# Altium PCB PCB1.PcbDoc
Units mm, origin at the board's own origin, x right, y up, seen from the top; angles counter-clockwise.
Board outline 67.6 x 70 mm, 2 copper layers (Top Layer, Bottom Layer); 49 components, 45 nets, 237 pads, 52 vias.
Unrouted connection lines stored in the file: 12.
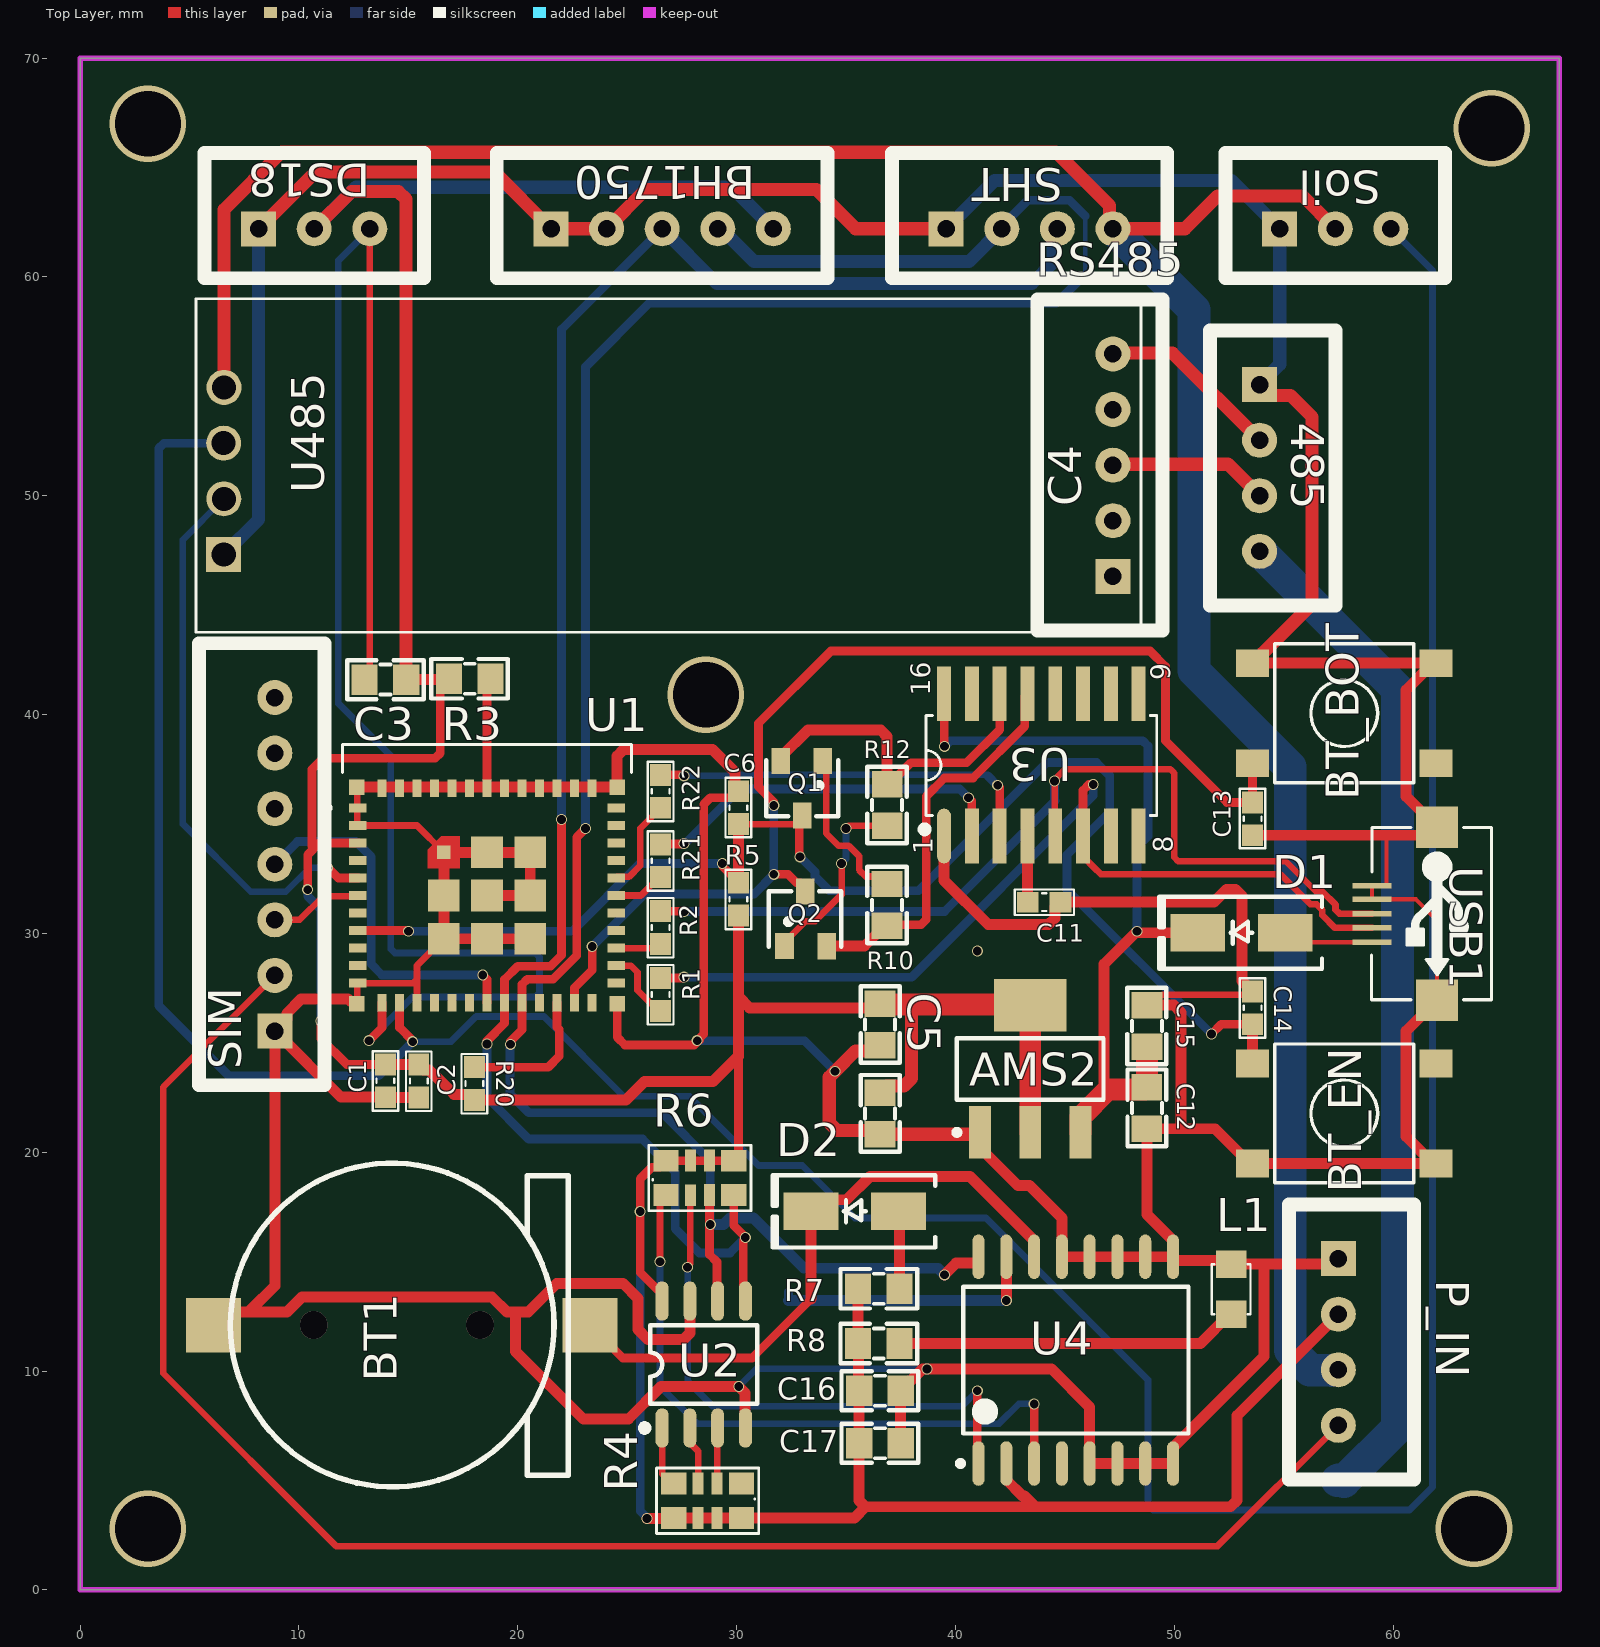
[diagram p0: Top Layer view]
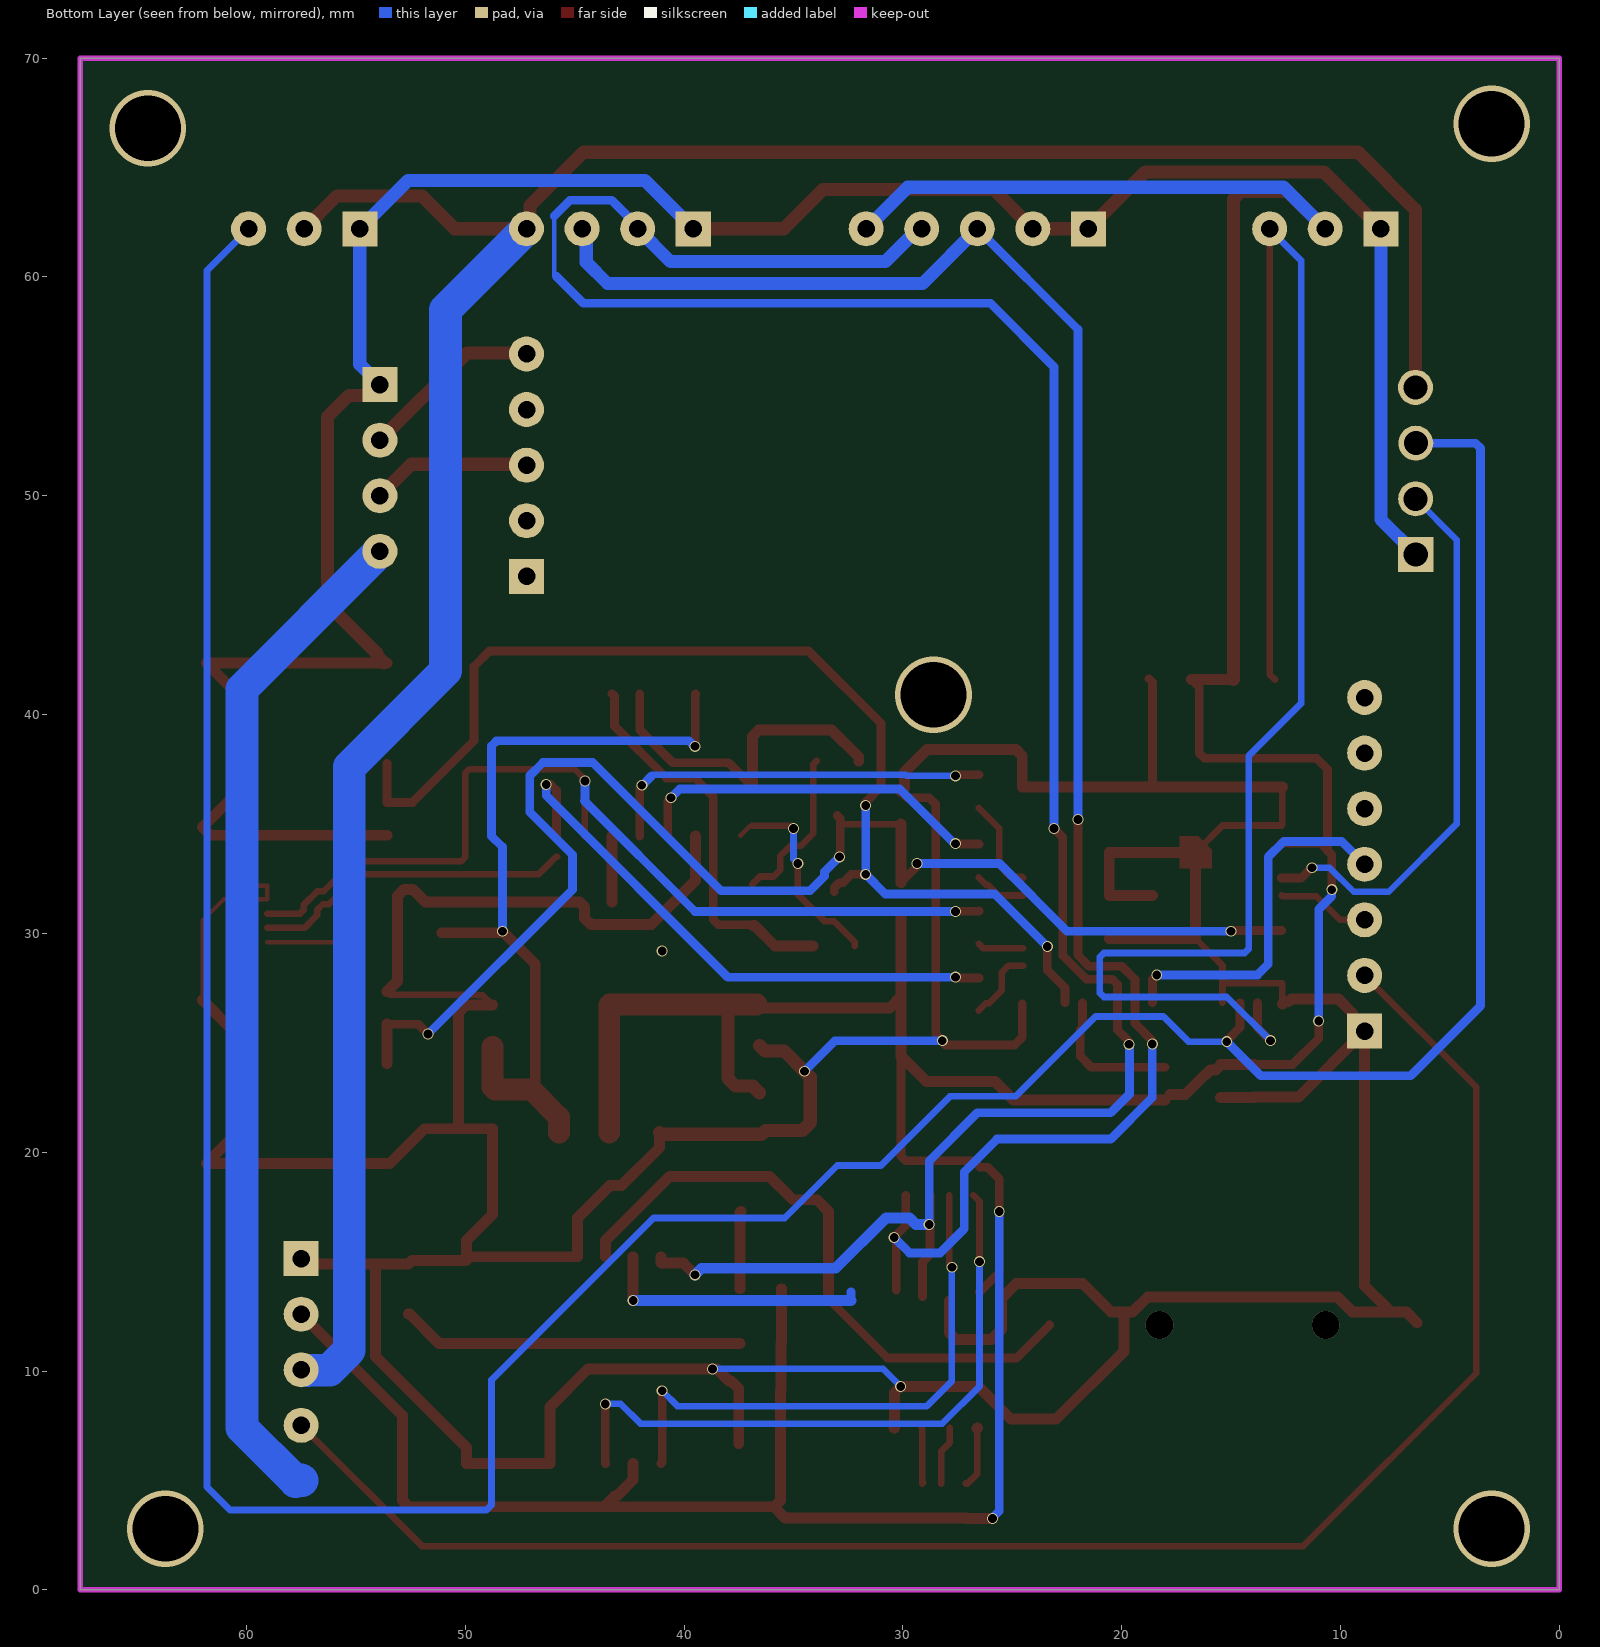
[diagram p1: Bottom Layer view, seen from below]
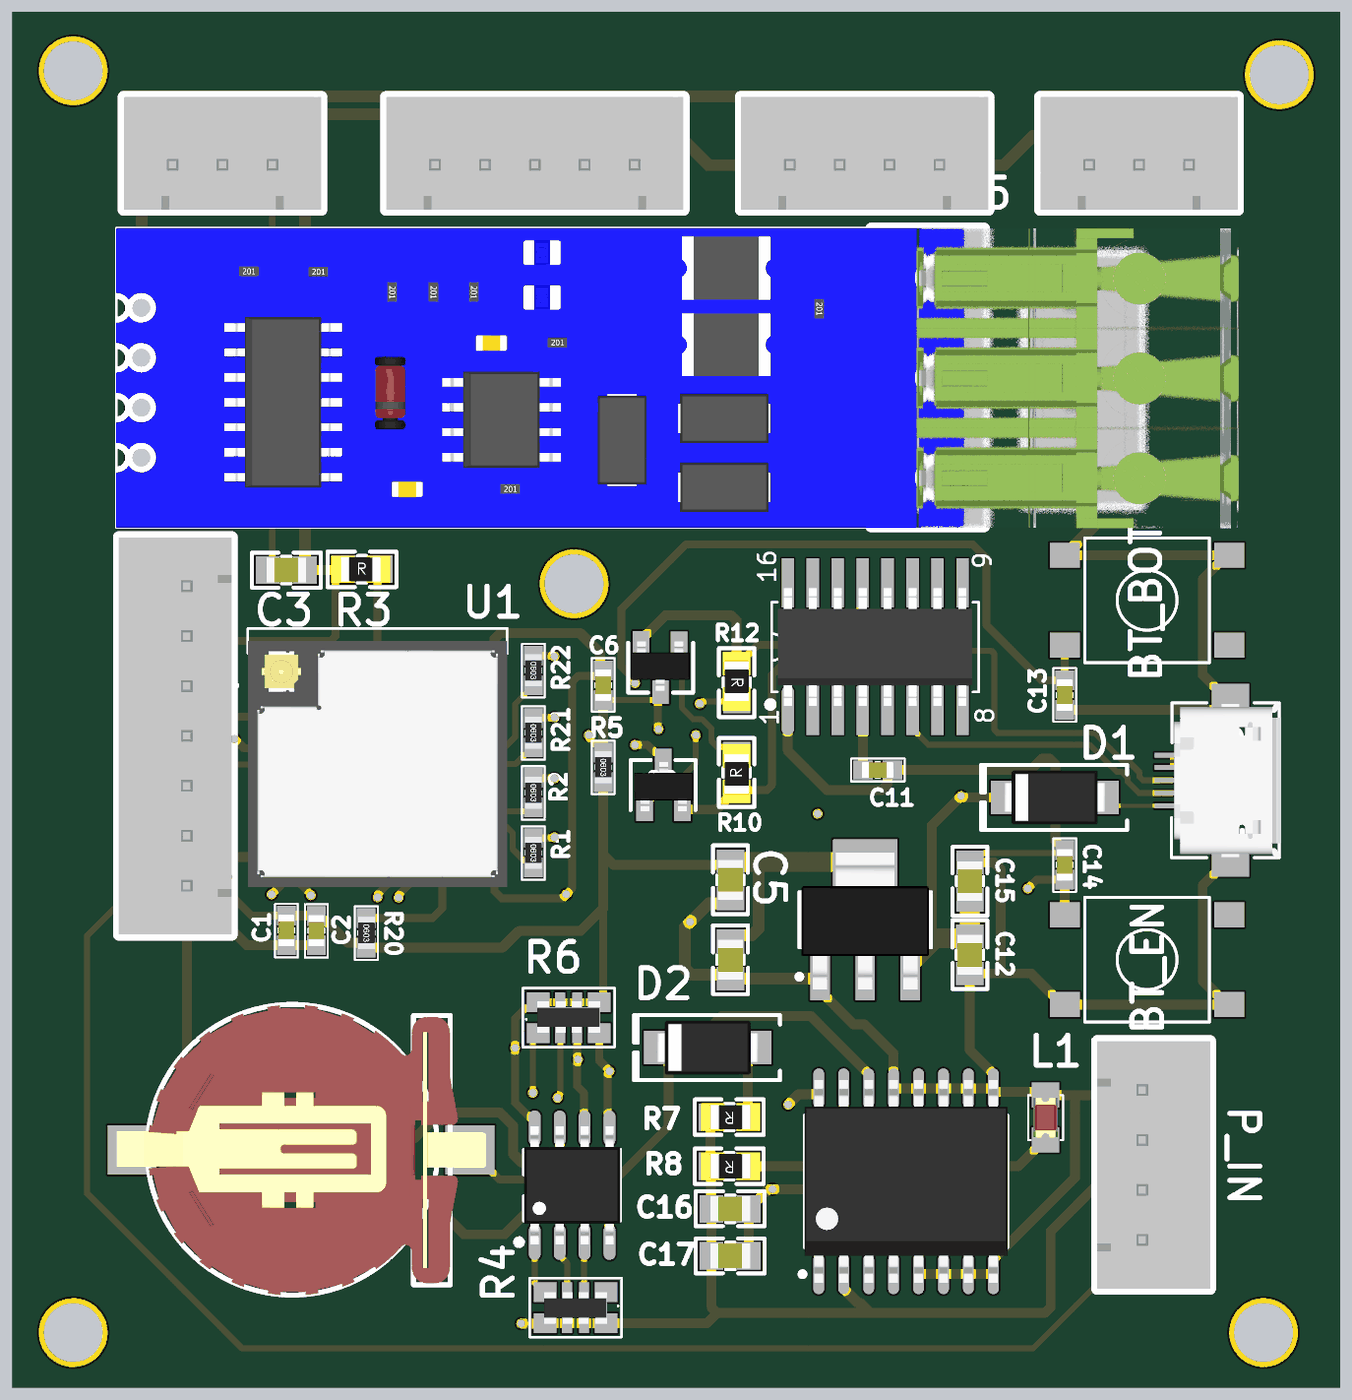
[diagram p2: 3D render of the assembled board from above, using the file's embedded part models]

## Layer stack, top to bottom
Top Solder: solder mask 0.0102, Solder Resist, Dk 3.5
Top Layer: signal copper 0.0356
Dielectric 1: dielectric 0.32, FR-4, Dk 4.8
Bottom Layer: signal copper 0.0356
Bottom Solder: solder mask 0.0102, Solder Resist, Dk 3.5

## Board outline
0,0 67.6,0 67.6,70 0,70

## Design rules (kind name [scope] priority, off if disabled: settings)
Clearance [All] p1: gap=0.4 ignorepadtopadclearanceinfootprint=FALSE
PolygonConnect [All] p1: connectstyle=Relief reliefconductorwidth=0.254 reliefentries=4 polygonreliefangle="90 Angle" airgapwidth=0.254
RoutingVias [All] p1: holewidth=0.1 width=0.12 viastyle="Through Hole" minholewidth=0.05 minwidth=0.1 maxholewidth=1 maxwidth=1.27
SolderMaskExpansion [All] p1: expansion=0.102 istentingtop=FALSE
Width [All] p1: maxlimit=3 minlimit=0.1 preferedwidth=0.31
30 further rules are at their usual default settings.

## Classes and differential pairs
component class SIM: SIM
component class RS485: 485 RS485 U485
component class Soil: Soil
component class Soil_temp: C3 DS18 R3
component class SHT: SHT
component class RTC: BT1 C16 C17 D2 L1 R4 R6 R7 R8 U2 U4
component class BH1750: BH1750
component class ESP32C3-MINI: AMS2 BT_BOT BT_EN C1 C2 C4 C5 C6 C11 C12 C13 C14 C15 D1 P_IN Q1 Q2 R1 R2 R5 R10 R12 R20 R21 R22 U1 U3 USB1

## Components (designator, comment, footprint, x,y, rotation, side; value= is the part's Value field where it differs from the comment)
485 "Header 4P 2.54 Duc Thang" XH2.54M-4 53.9,55.08 r270 top
AMS2 "AMS1117-3.3V" SOT223 43.418,23.807 r0 top value="AMS1117-3.3V SOT223"
BH1750 "Header 5P 2.54 Duc Thang" XH2.54M-5 21.52,62.2 r0 top
BT1 "CR1220 SMD" "DE PIN CR1220" 14.7,12.1 r90 top
BT_BOT "Nut Nhan 4 Chan SMD 6x6" "Nut Nhan 4 Chan SMD 6x6" 57.769,40.063 r180 top
BT_EN "Nut Nhan 4 Chan SMD 6x6" "Nut Nhan 4 Chan SMD 6x6" 57.769,21.775 r0 top
C1 "106" "tu 0603" 13.954,23.265 r270 top
C2 "104" "tu 0603" 15.478,23.253 r270 top
C3 "105" "tu 0805" 13.954,41.597 r180 top
C4 "106" "tu 0805" 36.56,21.775 r270 top
C5 "104" "tu 0805" 36.56,25.839 r270 top
C6 "105" "tu 0603" 30.083,35.745 r90 top
C11 "104" "tu 0603" 44.053,31.427 r0 top
C12 "106" "tu 0805" 48.752,22.029 r270 top
C13 "0.1uF/50V" "tu 0603" 53.578,35.237 r90 top
C14 "0.1uF/50V" "tu 0603" 53.578,26.601 r270 top
C15 "104" "tu 0805" 48.749,25.769 r90 top
C16 "104" "tu 0805" 36.546,9.103 r0 top
C17 "104" "tu 0805" 36.546,6.703 r0 top
D1 "SS34" "DIODE SMA" 53.07,30.03 r180 top
D2 "SS34" "DIODE SMA" 35.4,17.3 r180 top
DS18 "Header 3P 2.54 Duc Thang" XH2.54M-3 8.16,62.2 r0 top
L1 "LED 0805" LED-0805-Red 52.6,12.6 r90 top
P_IN "Header 4P 2.54 Duc Thang" XH2.54M-4 57.5,15.14 r270 top
Q1 "BC817" SOT-23 33.004,36.634 r180 top value=C9014
Q2 "BC817" SOT-23 33.131,30.665 r0 top value=C9014
R1 "0R" "tro smd 0603" 26.527,27.212 r270 top
R2 "0R" "tro smd 0603" 26.527,30.272 r270 top
R3 "4.7k" "tro smd 0805" 17.8,41.7 r0 top
R4 "4.7k" "tro bang 0603 4" 28.7,4.1 r270 top
R5 "10k" "tro smd 0603" 30.083,31.566 r270 top
R6 "4.7k" "tro bang 0603 4" 28.3,18.8 r90 top
R7 "200R" "tro smd 0805" 36.5,13.7 r180 top
R8 "1k" "tro smd 0805" 36.5,11.2 r180 top
R10 "10k" "tro smd 0805" 36.814,31.3 r90 top
R12 "10k" "tro smd 0805" 36.941,35.872 r270 top
R20 "10k" "tro smd 0603" 18.018,23.138 r270 top
R21 "0R" "tro smd 0603" 26.527,33.32 r270 top
R22 "0R" "tro smd 0603" 26.527,36.495 r270 top
RS485 "Header 5P 2.54 Duc Thang" XH2.54M-5 47.2,46.32 r90 top
SHT "Header 4P 2.54 Duc Thang" XH2.54M-4 39.58,62.2 r0 top
SIM "Header 7P 2.54 Duc Thang" XH2.54M-7 8.9,25.54 r90 top
Soil "Header 3P 2.54 Duc Thang" XH2.54M-3 54.82,62.2 r0 top
U1 "ESP32-C3-MINI-1U-N4" XCVR_ESP32-C3-MINI-1U-N4 18.595,31.732 r0 top
U2 "M95080" SOP8_L 28.5,10.3 r90 top
U3 "CH340C" SOIC16_50_284_25X90_SMT 43.901,37.702 r90 top
U4 "DS3231 SMD" "SOIC 16" 45.5,10.5 r90 top
U485 "Module rs485" RS485 37.3,51 r180 top
USB1 "USB Micro 5p SMD" "USB Micro 5p SMD" 59.039,30.904 r270 top

## Footprints (in the part's own frame and the unit in brackets; to place one, negate y for a bottom-side part, rotate by r counter-clockwise, add the part's x,y. Pads: shape width x height; smd on the part's side, far side on the other; paste and mask are expansions set on the pad)
"DE PIN CR1220" [mm]
  rect 2.5x2.5 smd: 1(0,-8.6) 2(0,8.6)
  silkscreen extent -7.39,-7.6 7.4,7.84, body extent -7.39,-9.42 7.36,9.38, height 4.27
"DIODE SMA" [mm] "SMA"
  rect 2.5x1.7 smd: 1(-2,0) 2(2,0)
  silkscreen extent -3.68,-1.65 3.75,1.65, body extent -2.6,-1.37 2.6,1.37, height 2.4
LED-0805-Red [mil]
  rect 50x55 smd: 1(0,0) 2(90,0)
  silkscreen extent 0,-35 90,35, body extent 5,-25 85,25, height 43
"Nut Nhan 4 Chan SMD 6x6" [mil] "SW SMD button 4pin, 250 x250 mil"
  rect 60x50 smd: 1(-165,90) 2(165,-90) 3(165,90) 4(-165,-90)
  silkscreen extent -125,-125 125,125, body extent -180,-125 180,125, height 130
RS485 [mm]
  round 1.6 hole 1.1: 4(30.723,-3.951) 5(30.738,-1.404) 6(30.732,1.139)
  rect 1.6x1.6 hole 1.1: 7(30.736,3.682)
  silkscreen extent -11.18,-8 32,7.24, body extent -25.13,-8 32,7.27, height 19.67
SOIC16_50_284_25X90_SMT [mm]
  oval 2.5x0.635 smd mask+0.076: 1(-3.25,4.42)
  rect 2.5x0.635 smd mask+0.076: 2(-3.25,3.15) 3(-3.25,1.88) 4(-3.25,0.61) 5(-3.25,-0.66) 6(-3.25,-1.93) 7(-3.25,-3.2) 8(-3.25,-4.47) 9(3.25,-4.47) 10(3.25,-3.2) 11(3.25,-1.93) 12(3.25,-0.66) 13(3.25,0.61) 14(3.25,1.88) 15(3.25,3.15) 16(3.25,4.42)
  silkscreen extent -3.07,-5.3 2.26,5.44, body extent -3.02,-4.97 2.98,4.93, height 1.4
"SOIC 16" [mm] "SOIC, 16-Leads, Body 10.30x7.50mm, Pitch 1.27mm, IPC Medium Density"
  oval 2.032x0.55 smd: 1(-4.725,4.445) 2(-4.725,3.175) 3(-4.725,1.905) 4(-4.725,0.635) 5(-4.725,-0.635) 6(-4.725,-1.905) 7(-4.725,-3.175) 8(-4.725,-4.445) 9(4.725,-4.445) 10(4.725,-3.175) 11(4.725,-1.905) 12(4.725,-0.635) 13(4.725,0.635) 14(4.725,1.905) 15(4.725,3.175) 16(4.725,4.445)
  silkscreen extent -4.85,-5.15 3.35,5.39, body extent -5.15,-5.17 5.16,5.16, height 2.48
SOP8_L [mm] "SOIC, 8-Leads, Body 4.9x3.9mm, Pitch 1.27mm, IPC High Density"
  oval 1.8x0.6 smd: 1(-2.9,1.905) 2(-2.9,0.635) 3(-2.9,-0.635) 4(-2.9,-1.905) 5(2.9,-1.905) 6(2.9,-0.635) 7(2.9,0.635) 8(2.9,1.905)
  silkscreen extent -3.2,-2.44 1.8,3, body extent -3.01,-2.45 2.99,2.45, height 1.75
SOT223 [mm]
  rect 1x2.4 smd: 1(-2.3,-2.9) 2(0,-2.9) 3(2.3,-2.9)
  rect 3.3x2.4 smd: 4(0,2.9)
  silkscreen extent -3.47,-3.02 3.35,1.4, body extent -3.25,-3.56 3.25,3.4, height 1.68
SOT-23 [mm] "SOT 23 _ 1-3-2"
  rect 0.85x1.2 smd: 1(-0.94,-1.245) 2(0.985,-1.25) 3(0.005,1.25)
  silkscreen extent -1.65,-1.27 1.65,1.27, body extent -1.47,-1.33 1.53,1.17, height 1.06
"tro bang 0603 4" [mil]
  rect 39.37x45.67 smd: 1(-30,60) 4(-30,-62) 5(32,-62) 8(32,60)
  rect 39.37x20 smd: 2(-30.06,16.08) 3(-30,-18.08) 6(32.06,-18.08) 7(32.06,16.08)
  silkscreen extent -58,-93 60,91, body extent -29,-64 33,62, height 22
"tro smd 0603" [mm] "Chip Capacitor, 2-Leads, Body 1,60x0,80mm, IPC Medium Density"
  rect 1x0.95 smd mask+0.076: 1(-0.75,0) 2(0.75,0)
  silkscreen extent -1.35,-0.58 1.37,0.58, body extent -0.82,-0.42 0.82,0.43, height 0.44
"tro smd 0805" [mm]
  rect 1.2x1.4 smd: 1(-0.946,-0.061) 2(0.954,-0.061)
  silkscreen extent -1.75,-0.97 1.75,0.84, body extent -1.56,-0.76 1.44,0.64, height 0.53
"tu 0603" [mm] "Chip Capacitor, 2-Leads, Body 1,60x0,80mm, IPC Medium Density"
  rect 1x0.95 smd mask+0.076: 1(-0.75,0) 2(0.75,0)
  silkscreen extent -1.35,-0.58 1.37,0.58, body extent -0.8,-0.4 0.8,0.4, height 0.9
"tu 0805" [mm] "Compoment SMD 80x50mil"
  rect 1.2x1.4 smd: 1(-0.946,-0.003) 2(0.954,-0.003)
  silkscreen extent -1.75,-0.89 1.75,0.89, body extent -1.01,-0.64 1.01,0.63, height 0.61
"USB Micro 5p SMD" [mil]
  rect 10x70 smd: 1(51.18,0) 2(25.59,0) 3(0,0) 4(-25.59,0) 5(-50,0)
  rect 74.8x74.8 smd: 5(-155.51,116.84) 5(155.51,116.84)
  silkscreen extent -155,-1 155,215, body extent -157,5 158,218, height 107
XCVR_ESP32-C3-MINI-1U-N4 [mm]
  rect 0.8x0.4 smd: 1(-5.9,4) 2(-5.9,3.2) 3(-5.9,2.4) 4(-5.9,1.6) 5(-5.9,0.8) 6(-5.9,0) 7(-5.9,-0.8) 8(-5.9,-1.6) 9(-5.9,-2.4) 10(-5.9,-3.2) 11(-5.9,-4) 25(5.9,-4) 26(5.9,-3.2) 27(5.9,-2.4) 28(5.9,-1.6) 29(5.9,-0.8) 30(5.9,0) 31(5.9,0.8) 32(5.9,1.6) 33(5.9,2.4) 34(5.9,3.2) 35(5.9,4)
  rect 0.4x0.8 smd: 12(-4.8,-4.9) 13(-4,-4.9) 14(-3.2,-4.9) 15(-2.4,-4.9) 16(-1.6,-4.9) 17(-0.8,-4.9) 18(0,-4.9) 19(0.8,-4.9) 20(1.6,-4.9) 21(2.4,-4.9) 22(3.2,-4.9) 23(4,-4.9) 24(4.8,-4.9) 36(4.8,4.9) 37(4,4.9) 38(3.2,4.9) 39(2.4,4.9) 40(1.6,4.9) 41(0.8,4.9) 42(0,4.9) 43(-0.8,4.9) 44(-1.6,4.9) 45(-2.4,4.9) 46(-3.2,4.9) 47(-4,4.9) 48(-4.8,4.9)
  rect 0.6x0.6 smd paste-1 mask+0: 49_1(-1.975,1.975)
  rect 1.45x1.45 smd: 49_2(0,1.975) 49_3(1.975,1.975) 49_4(1.975,0) 49_5(1.975,-1.975) 49_6(0,-1.975) 49_7(-1.975,-1.975) 49_8(-1.975,0) 49_9(0,0)
  rect 0.7x0.7 smd: 50(5.95,4.95) 51(5.95,-4.95) 52(-5.95,-4.95) 53(-5.95,4.95)
  Top Layer region: -1.25,1.25 -2.7,1.25 -2.7,2.1 -2.1,2.7 -1.25,2.7
  silkscreen extent -7.35,3.9 6.6,6.9, body extent -6.6,-6.25 6.6,6.25, height 2.55
XH2.54M-3 [mm]
  rect 1.6x1.6 hole 0.8: 1(0,0)
  round 1.6 hole 0.8: 2(2.54,0) 3(5.08,0)
  silkscreen extent -2.48,-2.26 7.56,3.46, body extent -2.48,-2.26 7.56,3.48, height 6.91
XH2.54M-4 [mm]
  rect 1.6x1.6 hole 0.8: 1(0,0)
  round 1.6 hole 0.8: 2(2.54,0) 3(5.08,0) 4(7.62,0)
  silkscreen extent -2.48,-2.26 10.1,3.46, body extent -2.48,-2.26 10.1,3.48, height 6.91
XH2.54M-5 [mm]
  rect 1.6x1.6 hole 0.8: 1(0,0)
  round 1.6 hole 0.8: 2(2.54,0) 3(5.08,0) 4(7.62,0) 5(10.16,0)
  silkscreen extent -2.48,-2.26 12.64,3.46, body extent -2.48,-2.26 12.64,3.48, height 6.91
XH2.54M-7 [mm]
  rect 1.6x1.6 hole 0.8: 1(0,0)
  round 1.6 hole 0.8: 2(2.54,0) 3(5.08,0) 4(7.62,0) 5(10.16,0) 6(12.7,0) 7(15.24,0)
  silkscreen extent -2.48,-2.26 17.72,3.46, body extent -2.48,-2.26 17.72,3.48, height 6.91

## Part data
485 BH1750 DS18 RS485 SHT SIM Soil: "Cắm", Chung_Loai=Cắm, Don_Vi=Con
  485 SHT: Ma_Hang=MH001285, Ten_Linh_Kien="Header 4P XH2.54-4P Đực Thẳng"
  BH1750 RS485: Ma_Hang=MH001298, Ten_Linh_Kien="Header 5P XH2.54-5P Đực Thẳng"
  DS18 Soil: Ma_Hang=MH001292, Ten_Linh_Kien="Header 3P XH2.54-3P Đực Thẳng"
  SIM: Ma_Hang=MH003369, Ten_Linh_Kien="Header 7P XH2.54-7P Đực Thẳng"
AMS2: library part "AMS1117 SMD", "Dán", Chung_Loai=Dán, Don_Vi=Con, Ma_Hang=MH000596
BT1: library part "De pin CR1220 SMD", Ma_Hang=MH000833, Ten="Đế PIN CR1220 SMD"
BT_BOT BT_EN: "Nut Nhan 4 Chan 6.2x6.2x3.5", Ma_Hang=MH002424, Ten="Nút Nhấn 4 Chân 6.2x6.2x3.1MM SMD"
C1: library part "Tu 0603 106 16V 20%", "Dán", Chung_Loai=Dán, Don_Vi=Con, Ma_Hang=MH004848, So_Chan=2, Ten_Linh_Kien="Tụ 0603-10uF 20% 16V"
C2 C11: library part "Tu 0603 104 50V 10%", "Dán", Chung_Loai=Dán, Don_Vi=Con, Ma_Hang=MH004568, So_Chan=2, Ten_Linh_Kien="Tụ 0603 104-100nF 10% 50V"
C3: library part "Tu 0805 105 50V 10%", "Dán", Chung_Loai=Dán, Don_Vi=Con, Ma_Hang=MH004552, So_Chan=2, Ten_Linh_Kien="Tụ 0805 105-1uF 10% 50V"
C4 C12: library part "Tu 0805 106 16V 10%", "Dán", Chung_Loai=Dán, Don_Vi=Con, Ma_Hang=MH004553, So_Chan=2, Ten_Linh_Kien="Tụ 0805 106-10uF 10% 16V"
C5 C15 C16 C17: library part "Tu 0805 104 50V 10%", "Dán", Chung_Loai=Dán, Don_Vi=Con, Ma_Hang=MH004551, So_Chan=2, Ten_Linh_Kien="Tụ 0805 104-100nF 10% 50V"
C6 C13 C14: library part "Tu 0603 105 50V 10%", "Dán", Chung_Loai=Dán, Don_Vi=Con, Ma_Hang=MH004569, So_Chan=2, Ten_Linh_Kien="Tụ 0603 105-1uF 50V 10%"
D1 D2: library part "Diode SS34 ( 1N5822 )", "Dán", Chung_Loai=Dán, Don_Vi=Con, Ma_Hang=MH002104, Ten_Linh_Kien="Diode SS34 3A 40V SMA ( 1N5822 SS34A)"
L1: library part "LED 0805 Do", "Dán", Chung_Loai=Dán, Don_Vi=Con, Ma_Hang=MH000897, Ten_Linh_Kien="LED 0805 Màu Đỏ (Red)"
P_IN: library part "Header 5P 2.54 Duc Thang", "Cắm", Chung_Loai=Cắm, Don_Vi=Con, Ma_Hang=MH001298, Ten_Linh_Kien="Header 5P XH2.54-5P Đực Thẳng"
Q1 Q2: library part "Trans BC817", "SOT-23 - C8658"
R1 R2 R21 R22: library part "Tro 0603 1% 0R", "Dán", Chung_Loai=Dán, Don_Vi=Con, Ma_Hang=MH005792, So_Chan=2, Ten_Linh_Kien="Trở 0603 1% 0R"
R3: library part "Tro 0805 5% 4.7k", "Dán", Chung_Loai=Dán, Don_Vi=Con, Ma_Hang=MH005307, So_Chan=2, Ten_Linh_Kien="Trở 0805 5% 4.7k"
R4 R6: library part "Tro bang 0603 4.7k", "Dán", Chung_Loai=Dán, Don_Vi=Con, Ma_Hang=MH001448, So_Chan=8, Ten_Linh_Kien="Trở băng 0603x4 4.7k"
R5 R20: library part "Tro 0603 1% 10k", "Dán", Chung_Loai=Dán, Don_Vi=Con, Ma_Hang=MH006333, So_Chan=2, Ten_Linh_Kien="Trở 0603 1% 10k"
R7: library part "Tro 0805 5% 220R", "Dán", Chung_Loai=Dán, Don_Vi=Con, Ma_Hang=MH005259, So_Chan=2, Ten_Linh_Kien="Trở 0805 5% 220R"
R8: library part "Tro 0805 1% 1k", "Dán", Chung_Loai=Dán, Don_Vi=Con, Ma_Hang=MH005468, So_Chan=2, Ten_Linh_Kien="Trở 0805 1% 1k"
R10 R12: library part "Tro 0805 1% 10k", "Dán", Chung_Loai=Dán, Don_Vi=Con, Ma_Hang=MH005473, So_Chan=2, Ten_Linh_Kien="Trở 0805 1% 10k"
U1: "Bluetooth, WiFi 802.11b/g/n, Bluetooth v5.0 Transceiver Module 2.412GHz ~ 2.484GHz Antenna Not Included, I-PEX Surface Mount", Package=None, Availability="In Stock", Check_prices=https://www.snapeda.com/parts/ESP32-C3-MINI-1U-N4/Espressif+Systems/view-part/?ref=eda, MF="Espressif Systems", MP=ESP32-C3-MINI-1U-N4, Price=None, Purchase-URL=https://pricing.snapeda.com/search/part/ESP32-C3-MINI-1U-N4/?ref=eda, SnapEDA_Link=https://www.snapeda.com/parts/ESP32-C3-MINI-1U-N4/Espressif+Systems/view-part/?ref=snap
U2: library part EEPROM_M95080, "EEPROM_M95080"
U3: library part IC_CH340C, "USB Bridge, USB to UART USB 2.0 UART Interface", Alternate Part Number-1=NA, Case/Package=SOIC16, Manufacturer=Olimex, Supplier Part Number-1=C84681, Manufacturer Part Number=CH340C, Supplier-1=LCSC
U4: "SOIC"
USB1: "USB Type B", Ma_Hang=MH001020, Ten="MicroUSB MK5P SMD"

## Via types
v1: diameter 0.5, hole 0.4, Top Layer to Bottom Layer, 45 vias
v2: diameter 3.5, hole 3, Top Layer to Bottom Layer, 5 vias
v3: diameter 1.27, hole 1.27, Top Layer to Bottom Layer, 2 vias

## Nets (pads, with @x,y where several pads share a name; then routed paths per layer and width w, separated by ;. In a path a pad name is that pad's centre, name@x,y a point inside that pad or via, vN(x,y) a via of type N, cw(c..) or ccw(c..) an arc to the next point about the centre after c; other vN are vias at no path point)
BAT_11V6: 485.4 P_IN.4 | length 46.2
  Bottom Layer w1.5: 485.4 60.2,41.16 60.2,7.408 57.75,4.958 ; 57.454,4.999 57.473,4.999 57.5,5.026 57.527,4.999 57.546,4.999
CHIP_EN: BT_EN.1 BT_EN.3 C6.1 C14.2 Q1.3 R5.1 U1.8 | length 63.2
  Top Layer w0.3: C6.1 Q1.3@32.724,34.995
  Top Layer w0.4: U1.8 14.968,30.132 15,30.1 v1(15.005,30.1) ; v1(29.35,33.2) 29.369,33.181 29.369,33.055 30.083,32.341 R5.1 ; v1(32.9,33.5) 32.866,33.534 32.866,35.251 Q1.3 ; v1(51.7,25.4) 52.151,25.851 C14.2
  Top Layer w0.5: R5.1 C6.1 ; BT_EN.1 C14.2
  Bottom Layer w0.4: v1(15.005,30.1) 22.5,30.1 25.6,33.2 v1(29.35,33.2) ; v1(32.9,33.5) 33.584,32.816 33.584,32.614 34.248,31.95 38.311,31.95 44.172,37.811 46.45,37.811 47.05,37.211 47.05,35.55 45.1,33.6 45.1,32 v1(51.7,25.4)
DN: R1.1 U3.6 USB1.2 | length 40.9
  Top Layer w0.3: U3.6@45.8,33.5 45.85,33.5 46.333,33.017 46.333,33.016 46.649,32.7 52.351,32.7 54.851,32.7 56.221,31.33 56.506,31.33 56.77,31.066 56.77,30.831 57.347,30.254 USB1.2
  Top Layer w0.4: R1.1 27.535,27.962 27.573,28 v1(27.6,28) ; U3.6 45.831,36.531 v1@46.1,36.8
  Bottom Layer w0.4: v1(27.6,28) 38,28 46.3,36.3 v1(46.3,36.8)
DP: R2.1 U3.5 USB1.3 | length 43.4
  Top Layer w0.3: v1(44.524,36.961) 44.542,36.942 44.542,34.471 U3.5 ; v1@44.561,37.061 45,37.5 49.824,37.5 50,37.324 50,33.476 50.176,33.3 52.6,33.3 55.1,33.3 56.47,31.93 56.755,31.93 57.37,31.315 57.37,31.08 57.546,30.904 USB1.3
  Top Layer w0.4: R2.1 26.538,31.011 27.589,31.011 v1(27.6,31)
  Bottom Layer w0.4: v1(27.6,31) 39.5,31 44.561,36.061 44.524,36.098 v1(44.524,36.961)
DTR: Q2.2 R10.1 U3.13 | length 18
  Top Layer w0.4: R10.1 36.92,30.4 38.429,30.4 38.663,30.634 38.663,36.263 39.5,37.1 40.8,37.1 43.173,39.473 43.173,40.834 U3.13
  Top Layer w0.5: Q2.2 35.835,29.415 36.775,30.354 R10.1
GND: 485.1 AMS2.1 BH1750.1 BH1750.2 BT1.2 BT_BOT.2 BT_BOT.4 BT_EN.2 BT_EN.4 C1.2 C2.2 C4.2 C5.2 C6.2 C11.2 C12.2 C13.1 C14.1 C15.2 C16.2 C17.2 DS18.1 L1.2 P_IN.1 R3.2 SHT.1 SIM.1 Soil.1 U1.1 U1.2 U1.11 U1.14 U1.36 U1.37 U1.38 U1.39 U1.40 U1.41 U1.42 U1.43 U1.44 U1.45 U1.46 U1.47 U1.48 U1.49_1 U1.49_2 U1.49_3 U1.49_4 U1.49_5 U1.49_6 U1.49_7 U1.49_8 U1.49_9 U1.50 U1.51 U1.52 U1.53 U2.4 U2.7 U3.1 U4.5 U4.6 U4.7 U4.8 U4.9 U4.10 U4.11 U4.12 U4.13 U485.7 USB1.4 USB1.5 | length 456.7
  Top Layer w0.2: 59.7,34.487 59.7,32.201 59.673,32.174 59.039,32.174 USB1.4 61.046,31.554 62.007,30.593 USB1.5@62.007,26.954
  Top Layer w0.3: U1.52 12.67,26.807 12.67,27.707 U1.11 15.227,27.732 15.395,27.9 ; U1.53 U1.53@12.67,36.657 ; U1.14 15.395,27.9 ; U1.49_7 15.395,28.532 15.395,27.9 ; U1.49_1 15.395,34.932 U1.2 12.67,34.957 U1.53@12.67,36.657 ; C15.2 49.202,27.173 49.451,27.173 49.478,27.2 53.427,27.2 C14.1 ; U1.53@12.67,36.657 12.67,35.732 U1.53@12.67,36.657
  Top Layer w0.4: U1.42 18.595,36.682 18.595,41.48 R3.2 ; U1.51 24.545,25.255 24.9,24.9 28.066,24.9 v1@28.3,25.134 ; v1(28.2,25.1) 28.5,25.4 28.5,35.9 28.804,36.204 29.808,36.204 30.083,36.479 C6.2
  Top Layer w0.5: BT1.2@6.5,12.207 6.993,12.7 7.807,12.7 9.457,12.7 10.147,13.39 18.811,13.39 19.501,12.7 19.9,12.7 ; 7.807,12.807 8.9,13.9 SIM.1 ; U1.52 12.545,26.882 12.37,26.882 12.252,27 10.1,27 9.45,26.35 9.45,26.09 SIM.1 ; U1.53 U1.47@14.595,36.682 ; C2.2 15.472,22.509 13.96,22.509 C1.2 11.925,22.515 SIM.1 ; U1.49_9 U1.49_4 U1.49_3 U1.49_2 U1.49_1 U1.49_8 U1.49_7 U1.49_6 U1.49_5 ; U2.7 27.865,11.743 27.572,11.45 25.943,11.45 25.5,11.893 25.5,13.319 24.819,14 21.781,14 20.481,12.7 19.9,12.7 ; C6.2 29.926,36.652 29.926,37.374 28.9,38.4 24.838,38.4 24.545,38.107 U1.50 ; U2.4 30.4,7.395 30.393,7.402 30.393,9.007 v1(30.1,9.3) 26.551,9.3 25.051,7.8 23,7.8 19.9,10.9 19.9,12.7 ; C17.2 37.5,9.2 37.85,9.55 37.95,9.55 38.311,9.911 38.315,9.911 38.504,10.1 v1(38.7,10.1) 44.4,10.1 46.135,8.365 U4.5 U4.6 U4.7 U4.8 49.945,6.516 54.1,10.671 54.1,14.886 ; U3.1 39.481,32.419 41.5,30.4 44.26,30.4 44.553,30.693 44.553,31.202 44.778,31.427 C11.2 44.806,31.43 51.823,31.43 52.393,32 52.807,32 53.1,31.707 53.1,27.829 C14.1 ; AMS2.1 41.118,20.207 42.851,18.474 43.382,18.474 44.865,16.991 U4.13 U4.12 U4.11 U4.10 U4.9 ; C15.2 49.977,26.723 50.307,26.393 50.307,21.075 ; C13.1 59.7,34.487 61.64,34.487 62.007,34.854 60.6,36.261 60.6,41.116 61.833,42.349 53.705,42.349 BT_BOT.2 ; P_IN.1@57.2,15.1 56.986,14.886 54.1,14.886 ; USB1.5@62.007,26.954 60.6,25.547 60.6,20.722 61.833,19.489 BT_EN.4 53.451,19.489 51.865,21.075 50.307,21.075 ; U1.47@14.595,36.682 U1.42@18.595,36.682 ; U1.47@14.595,36.682 13.795,36.682 U1.42@18.595,36.682 ; U1.47@14.595,36.682 U1.42@18.595,36.682 ; U1.47@14.595,36.682 U1.45@16.195,36.682 ; U1.46@15.395,36.682 U1.44@16.995,36.682 ; U1.46@15.395,36.682 U1.44@16.995,36.682 ; U1.46@15.395,36.682 U1.45@16.195,36.682 ; U1.46@15.395,36.682 U1.44@16.995,36.682 ; U1.45@16.195,36.682 U1.44@16.995,36.682 ; U1.45@16.195,36.682 U1.44@16.995,36.682 ; U1.45@16.195,36.682 U1.44@16.995,36.682 ; U1.45@16.195,36.682 U1.44@16.995,36.682 ; U1.45@16.195,36.682 U1.44@16.995,36.682 ; U1.44@16.995,36.682 U1.42@18.595,36.682 ; U1.44@16.995,36.682 U1.42@18.595,36.682 ; U1.44@16.995,36.682 U1.42@18.595,36.682 ; U1.44@16.995,36.682 U1.42@18.595,36.682 ; U1.43@17.795,36.682 U1.42@18.595,36.682 ; U1.43@17.795,36.682 U1.42@18.595,36.682 ; U1.43@17.795,36.682 U1.42@18.595,36.682 ; U1.43@17.795,36.682 U1.42@18.595,36.682 ; U1.43@17.795,36.682 U1.42@18.595,36.682 ; U1.42@18.595,36.682 U1.40@20.195,36.682 ; U1.40@20.195,36.682 U1.39@20.995,36.682 ; U1.40@20.195,36.682 19.395,36.682 U1.39@20.995,36.682 ; U1.40@20.195,36.682 U1.39@20.995,36.682 ; U1.40@20.195,36.682 U1.39@20.995,36.682 ; U1.39@20.995,36.682 U1.50 ; U1.39@20.995,36.682 U1.37@22.595,36.682 ; U1.38@21.795,36.682 U1.36@23.395,36.682 ; U1.38@21.795,36.682 U1.37@22.595,36.682 ; U1.38@21.795,36.682 U1.36@23.395,36.682 ; U1.37@22.595,36.682 U1.36@23.395,36.682 ; U1.37@22.595,36.682 U1.36@23.395,36.682 ; U1.37@22.595,36.682 U1.36@23.395,36.682 ; U1.37@22.595,36.682 U1.36@23.395,36.682 ; U1.36@23.395,36.682 U1.50 ; U1.36@23.395,36.682 U1.50 ; U1.36@23.395,36.682 U1.50 ; U4.9 49.945,15.079 49.968,15.055 52.431,15.055 L1.2 54.1,14.886 ; U4.9 49.945,15.966 48.749,17.162 C12.2 50.307,21.075
  Top Layer w0.6: DS18.1 10.76,64.8 18.92,64.8 BH1750.1 BH1750.2 25.86,64 33.64,64 35.44,62.2 SHT.1 ; C5.2 36.306,24.634 35.434,24.634 v1(34.5,23.7) 34.235,23.435 34.235,21.351 34.586,21 36.277,21 36.457,20.821 C4.2 41.032,20.821 AMS2.1 ; BT_BOT.2@53.705,42.349 54.04,42.684 54.04,42.811 56.3,45.071 56.3,53.6 55.32,54.58 54.4,54.58 485.1
  Bottom Layer w0.3: v1(30.1,9.3) 30.9,10.1 v1(38.7,10.1)
  Bottom Layer w0.4: v1(28.2,25.1) 33.1,25.1 v1(34.5,23.7)
  Bottom Layer w0.6: U485.7 8.16,48.914 DS18.1 ; SHT.1 41.78,64.4 52.62,64.4 Soil.1 54.82,56 485.1
GPIO0: C3.2 DS18.3 U1.12 | length 74.5
  Top Layer w0.31: C3.2 13.24,41.84 DS18.3
  Top Layer w0.4: v1(13.2,25.1) 13.795,25.695 U1.12
  Bottom Layer w0.31: v1(13.2,25.1) 15.2,27.1 20.818,27.1 21,27.282 21,28.918 20.818,29.1 14.382,29.1 14.2,29.282 14.2,38.1 11.8,40.5 11.8,60.76 DS18.3
GPIO1: Soil.3 U1.13 U485.5 | length 162.6
  Top Layer w0.4: U1.13 14.595,25.705 15.2,25.1 v1(15.2,25.053)
  Bottom Layer w0.31: v1(15.2,25.053) 16.952,25.053 18.099,26.2 21.2,26.2 24.845,22.555 27.845,22.555 31,19.4 33,19.4 35.4,17 41.4,17 48.8,9.6 48.8,3.882 49.029,3.653 60.753,3.653 61.8,4.7 61.8,60.3 Soil.3
  Bottom Layer w0.4: U485.5 3.834,52.404 3.6,52.17 3.6,26.7 6.8,23.5 13.647,23.5 v1(15.2,25.053)
GPIO2: U1.5 U485.6 | length 25.6
  Top Layer w0.4: v1(11.3,33) 11.327,33 11.795,32.532 U1.5
  Bottom Layer w0.3: U485.6 4.7,47.993 4.7,35 7.8,31.9 9.4,31.9 10.5,33 v1(11.3,33)
GPIO3: SIM.3 U1.6 | length 4.3
  Top Layer w0.3: SIM.3 10.029,30.62 11.109,31.7 12.663,31.7 U1.6
GPIO4: SIM.4 U1.18 | length 16.7
  Top Layer w0.4: v1(18.4,28.1) 18.595,27.905 U1.18
  Bottom Layer w0.4: SIM.4 9.94,34.2 12.6,34.2 13.3,33.5 13.3,28.6 13.8,28.1 v1(18.4,28.1)
GPIO5: BH1750.3 R6.4 SHT.3 U1.19 U2.5 U4.15 | length 98.2
  Top Layer w0.4: v1(18.6,24.95) 18.6,25.1 19.395,25.895 U1.19 19.395,27.895 20,28.5 21.5,28.5 22,29 v1@22,35.1 ; R6.4 29.875,16.652 30.4,16.127 v1(30.4,16.1) 30.4,16.073 30.3,15.973 U2.5@30.3,13.7
  Top Layer w0.5: v1(42.325,13.225) U4.15
  Bottom Layer w0.4: v1(18.6,24.95) 18.6,22.5 20.5,20.6 25.7,20.6 27.2,19.1 27.2,16.5 28.3,15.4 29.7,15.4 v1(30.4,16.1) ; v1(22,35.2) 22,57.6 BH1750.3 ; 32.375,13.225 32.375,13.625
  Bottom Layer w0.5: 32.375,13.225 v1(42.325,13.225)
  Bottom Layer w0.6: BH1750.3 29.1,59.7 43.5,59.7 44.469,60.669 44.469,62.009 SHT.3
GPIO6: BH1750.4 R6.3 SHT.2 U1.20 U2.6 U4.16 | length 113.3
  Top Layer w0.4: v1(19.666,24.931) 19.666,25.066 20.195,25.595 U1.20 20.195,27.666 20.429,27.9 21.607,27.9 22.7,28.993 22.7,34.4 v1(23.1,34.8) ; R6.3 28.759,16.7 28.759,16.1 28.759,15.33 29.1,14.989 U2.6@29.1,13.4
  Top Layer w0.5: v1(39.5,14.4) 40.03,14.93 41.032,14.93 41.055,14.953 U4.16
  Bottom Layer w0.2: 45.934,60.034 45.934,62.581
  Bottom Layer w0.4: v1(19.666,24.931) 19.65,24.915 19.65,22.65 20.5,21.8 26.6,21.8 28.8,19.6 v1(28.8,16.7) ; v1(23.1,34.8) 23.1,55.9 26,58.8 44.6,58.8 45.834,60.034 ; SHT.2 42.12,62.32 43.3,63.5 45.116,63.5 ; 45.216,63.5 45.934,62.781
  Bottom Layer w0.5: v1(28.8,16.7) 29.4,16.7 29.7,17 30.773,17 33.073,14.7 39.2,14.7 v1(39.5,14.4)
  Bottom Layer w0.6: BH1750.4 29.3,62.2 30.8,60.7 40.62,60.7 SHT.2
GPIO7: U1.21
GPIO8: R20.1 U1.22 | length 6.6
  Top Layer w0.4: R20.1 21.388,23.888 21.9,24.4 21.9,25.608 21.795,25.713 U1.22
GPIO9: BT_BOT.1 BT_BOT.3 C13.2 Q2.3 U1.23 | length 52.1
  Top Layer w0.4: U1.23 22.595,27.522 23.4,28.327 v1(23.4,29.4) ; v1(31.7,32.7) 32.351,32.7 32.736,32.315 32.911,32.315 33.136,32.09 Q2.3 ; v1@31.7,36 31,36.7 31,39.6 34.3,42.9 48.9,42.9 49.6,42.2 49.6,38.8 52.413,35.987 C13.2 53.578,36.012 BT_BOT.3
  Bottom Layer w0.4: v1(23.4,29.4) 25.8,31.8 30.8,31.8 v1(31.7,32.7) v1(31.7,35.85)
GPIO10: U1.16
GPIO18: R1.2 U1.26 | length 3.4
  Top Layer w0.3: U1.26 25.168,28.532 25.473,28.227 25.473,27.404 26.066,26.812 26.202,26.812 26.527,26.487 R1.2
GPIO19: R2.2 U1.27 | length 2.1
  Top Layer w0.3: U1.27 26.337,29.332 R2.2
Net485_2: 485.2 RS485.5 | length 8
  Top Layer w0.6: RS485.5@47.5,56.52 49.92,56.52 485.2
Net485_3: 485.3 RS485.3 | length 7
  Top Layer w0.6: RS485.3@47.5,51.44 52.46,51.44 485.3
NetBT1_1: BT1.1 D2.2 U4.14 | length 28.7
  Top Layer w0.4: BT1.1 24.8,10.6 30.707,10.6 33.4,13.293
  Top Layer w0.5: 33.4,13.293 D2.2 33.93,17.83 35.03,17.83 36.1,18.9 40.661,18.9 43.595,15.966 U4.14
NetBT_1-: 
NetBT_2+: 
NetC11_1: C11.1 U3.4 | length 3
  Top Layer w0.5: U3.4 43.297,34.446 43.297,31.433 C11.1
NetD1_1: D1.1 USB1.1 | length 4.1
  Top Layer w0.2: D1.1 55.496,29.604 USB1.1
NetD2_1: D2.1 R7.1 | length 3.6
  Top Layer w0.5: D2.1 37.446,17.254 R7.1
NetL1_1: L1.1 R8.1 | length 15.7
  Top Layer w0.5: R8.1 51.197,11.261 52.537,12.6 L1.1
NetQ1_1: Q1.1 R10.2 | length 7.5
  Top Layer w0.3: Q1.1 34.1,37.722 34.1,34.569 34.669,34 35.131,34 35.6,33.531 35.6,32.9 35.901,32.599 36.53,32.599 R10.2
NetQ2_1: Q2.1 R12.2 | length 9.5
  Top Layer w0.2: R12.2 36.98,34.918 R12.2@37.43,34.468
  Top Layer w0.3: Q2.1 32.191,29.595 33.161,30.565 33.589,30.565 34.8,31.776 v1(34.8,33.2) ; v1(35,34.8) 35.118,34.918 R12.2
  Bottom Layer w0.3: v1(34.8,33.2) 35,33.4 v1(35,34.8)
NetR4_2: R4.2 U2.3 | length 2.6
  Top Layer w0.3: R4.2@29.072,4.9 R4.2 29.109,7.374 U2.3
NetR4_3: R4.3 U2.2 | length 2.7
  Top Layer w0.3: U2.2 27.865,6.719 28.241,6.343 R4.3
NetR4_4: R4.4 U2.1 | length 2.8
  Top Layer w0.3: U2.1 26.595,5.312 27.045,4.862 R4.4
  Top Layer w0.5: U2.1 U2.1@26.614,7.381
NetR6_1: R6.1 U4.3 | length 29.8
  Top Layer w0.3: v1(26.5,15) 26.5,17.762 R6.1
  Top Layer w0.4: U4.3 43.6,5.78 v1(43.6,8.5)
  Bottom Layer w0.3: v1(26.5,15) 26.5,9.3 28.2,7.6 41.997,7.6 42.897,8.5 v1(43.6,8.5)
NetR6_2: R6.2 U4.1 | length 25.9
  Top Layer w0.3: v1(27.759,14.744) 27.759,14.768 27.891,14.9 R6.2
  Top Layer w0.4: v1(41,9.1) 41,5.83 U4.1
  Bottom Layer w0.3: v1(27.759,14.744) 27.759,9.541 28.9,8.4 40.3,8.4 v1(41,9.1)
RTS: Q1.2 R12.1 U3.14 | length 15.7
  Top Layer w0.4: R12.1 36.98,36.818 37.963,37.8 40.51,37.8 42.021,39.311 U3.14
  Top Layer w0.5: Q1.2 32.019,38.059 33.259,39.3 36.587,39.3 36.88,39.007 R12.1
RXD: R22.1 U3.3 | length 18
  Top Layer w0.4: R22.1 27.528,37.245 27.573,37.2 v1(27.6,37.2) ; v1(41.929,36.771) 42.021,36.679 U3.3
  Bottom Layer w0.3: v1(27.6,37.2) 29.827,37.2 29.877,37.25 41.423,37.25 41.473,37.2
  Bottom Layer w0.4: 41.473,37.2 41.902,36.771 v1(41.929,36.771)
TXD: R21.1 U3.2 | length 17.1
  Top Layer w0.4: R21.1 26.542,34.085 27.585,34.085 v1(27.6,34.1) ; v1(40.6,36.2) 40.751,36.049 U3.2
  Bottom Layer w0.4: v1(27.6,34.1) 27.619,34.119 27.665,34.119 30.146,36.6 40.2,36.6 v1(40.6,36.2)
U0RXD: R21.2 U1.30 | length 2.4
  Top Layer w0.3: U1.30 25.626,31.732 26.114,32.22 26.202,32.22 26.527,32.545 R21.2
U0TXD: R22.2 U1.31 | length 4.4
  Top Layer w0.3: U1.31 24.545,32.582 25.082,32.582 25.6,33.1 25.6,34.793 26.527,35.72 R22.2
V_SIM_7V: SIM.2 | length 79.6
  Top Layer w0.3: SIM.2 3.8,22.98 3.8,9.9 11.7,2 51.98,2 57.5,7.52
VBUS: AMS2.3 C12.1 C15.1 D1.2 U3.16 | length 37.4
  Top Layer w0.4: U3.16 39.491,40.942 39.491,38.559 v1(39.5,38.55)
  Top Layer w0.5: 46.986,22.875 46.8,23.06 46.8,28.6 48.23,30.03 D1.2
  Top Layer w1: AMS2.3 45.718,21.607 46.986,22.875 48.649,22.875 C12.1 48.75,22.976 48.75,24.821 C15.1
  Bottom Layer w0.4: v1(39.5,38.55) 39.527,38.55 39.777,38.8 48.566,38.8 48.8,38.566 48.8,34.446 48.3,33.946 v1(48.3,30.1)
VCC_3V3MCU: AMS2.2 AMS2.4 C1.1 C2.1 C4.1 C5.1 R5.2 R20.2 U1.3
VCC_3V3PW: BH1750.5 C3.1 C16.1 C17.1 DS18.2 P_IN.2 R3.1 R4.5 R4.6 R4.7 R4.8 R6.5 R6.6 R6.7 R6.8 R7.2 R8.2 U2.8 U4.2 | length 207.2
  Top Layer w0.4: v1(10.4,32) 10.4,33.6 10.932,34.132 12.695,34.132 ; 10.6,34 10.6,37.5 11.1,38 16.22,38 16.454,38.234 16.454,41.239 16.815,41.6 R3.1 ; v1(11,26) 11,25.2 12.185,24.015 13.954,24.015 ; U2.8@26.501,13.6 25.596,14.505 v1(25.596,17.289) 25.596,18.787 26.122,19.313 26.476,19.313 R6.8 R6.5 30.083,19.821 30.083,24.383 29.979,24.279
  Top Layer w0.5: 13.954,24.015 13.96,24.009 15.472,24.009 15.478,24.003 15.478,23.978 15.703,23.753 15.947,23.753 16.147,23.553 16.181,23.553 17.096,22.638 17.793,22.638 ; C3.1 R3.1@16.815,41.6 ; 18.018,22.388 24.947,22.388 25.789,23.23 28.93,23.23 29.979,24.279 ; v1(25.909,3.264) 27.102,3.264 R4.5 R4.6 R4.7 ; R4.7 R4.8 35.38,3.287 35.893,3.8 ; 30.083,24.383 30.083,27.117 ; 30.083,30.816 30.083,27.117 ; R7.2 R8.2 35.573,11.234 35.573,9.127 C16.1 C17.1 35.6,4.093 35.893,3.8 ; 36.557,26.785 36.372,26.6 30.6,26.6 30.083,27.117 ; U4.2 42.325,5.034 43.059,4.3 43.162,4.3 43.662,3.8 ; P_IN.2 52.86,7.96 52.86,4.093 52.567,3.8 43.662,3.8 ; 35.893,3.8 43.662,3.8
  Top Layer w0.6: DS18.2 10.704,62.2 12.404,63.9 14.549,63.9 14.9,63.549 C3.1 ; 36.557,22.721 36.857,23.021 37.649,23.021 38,23.372 38,26.746 ; 36.557,26.785 36.657,26.785 36.695,26.746
  Top Layer w1: 36.695,26.746 38,26.746 43.379,26.746 43.418,26.707 43.418,20.907
  Bottom Layer w0.4: v1(10.4,32) 10.4,31.7 11,31.1 v1(11,26) ; v1(25.596,17.289) 25.596,3.603 25.909,3.291 v1(25.909,3.264)
  Bottom Layer w0.6: DS18.2 12.6,64.1 29.78,64.1 BH1750.5
VCC_5VPW: P_IN.3 SHT.4 Soil.2 U485.4 | length 120.1
  Top Layer w0.6: U485.4 6.577,63.077 9.2,65.7 44.6,65.7 47.048,63.252 47.048,62.352 SHT.4 50.485,62.2 51.985,63.7 55.86,63.7 Soil.2
  Bottom Layer w1.5: SHT.4 50.9,58.5 50.9,42 55.3,37.6 55.3,10.949 56.21,10.039 57.181,10.039 P_IN.3@57.2,10.02
pads on no net: R4.1 RS485.1 RS485.2 RS485.4 SIM.5 SIM.6 SIM.7 U1.4 U1.7 U1.9 U1.10 U1.15 U1.17 U1.24 U1.25 U1.28 U1.29 U1.32 U1.33 U1.34 U1.35 U3.7 U3.8 U3.9 U3.10 U3.11 U3.12 U3.15 U4.4
copper on no net:
  other v1: 41,29.2 41,29.2
  other v2: 3.1,2.8 63.7,2.8 28.6,40.9 64.5,66.8 3.1,67
  other v3: 10.674,12.1 18.279,12.105

## Keep-outs
Keep-Out Layer:
  the board outline again, w0.254

## Text inside footprints (layer, text, board x,y; h text height)
U3: Top Overlay "1" at 38.973,33.613 h0.89 r90; Top Overlay "8" at 49.933,33.686 h0.89 r90; Top Overlay "9" at 49.81,41.58 h0.89 r90; Top Overlay "16" at 38.846,40.852 h0.89 r90